# Altium PCB Amplification.PcbDoc
Units mm, origin at the board's own origin, x right, y up, seen from the top; angles counter-clockwise.
Board outline 40 x 40 mm, 2 copper layers (Top Layer, Bottom Layer), stack 1.534 mm thick; 12 components, 15 nets, 44 pads, 13 vias.
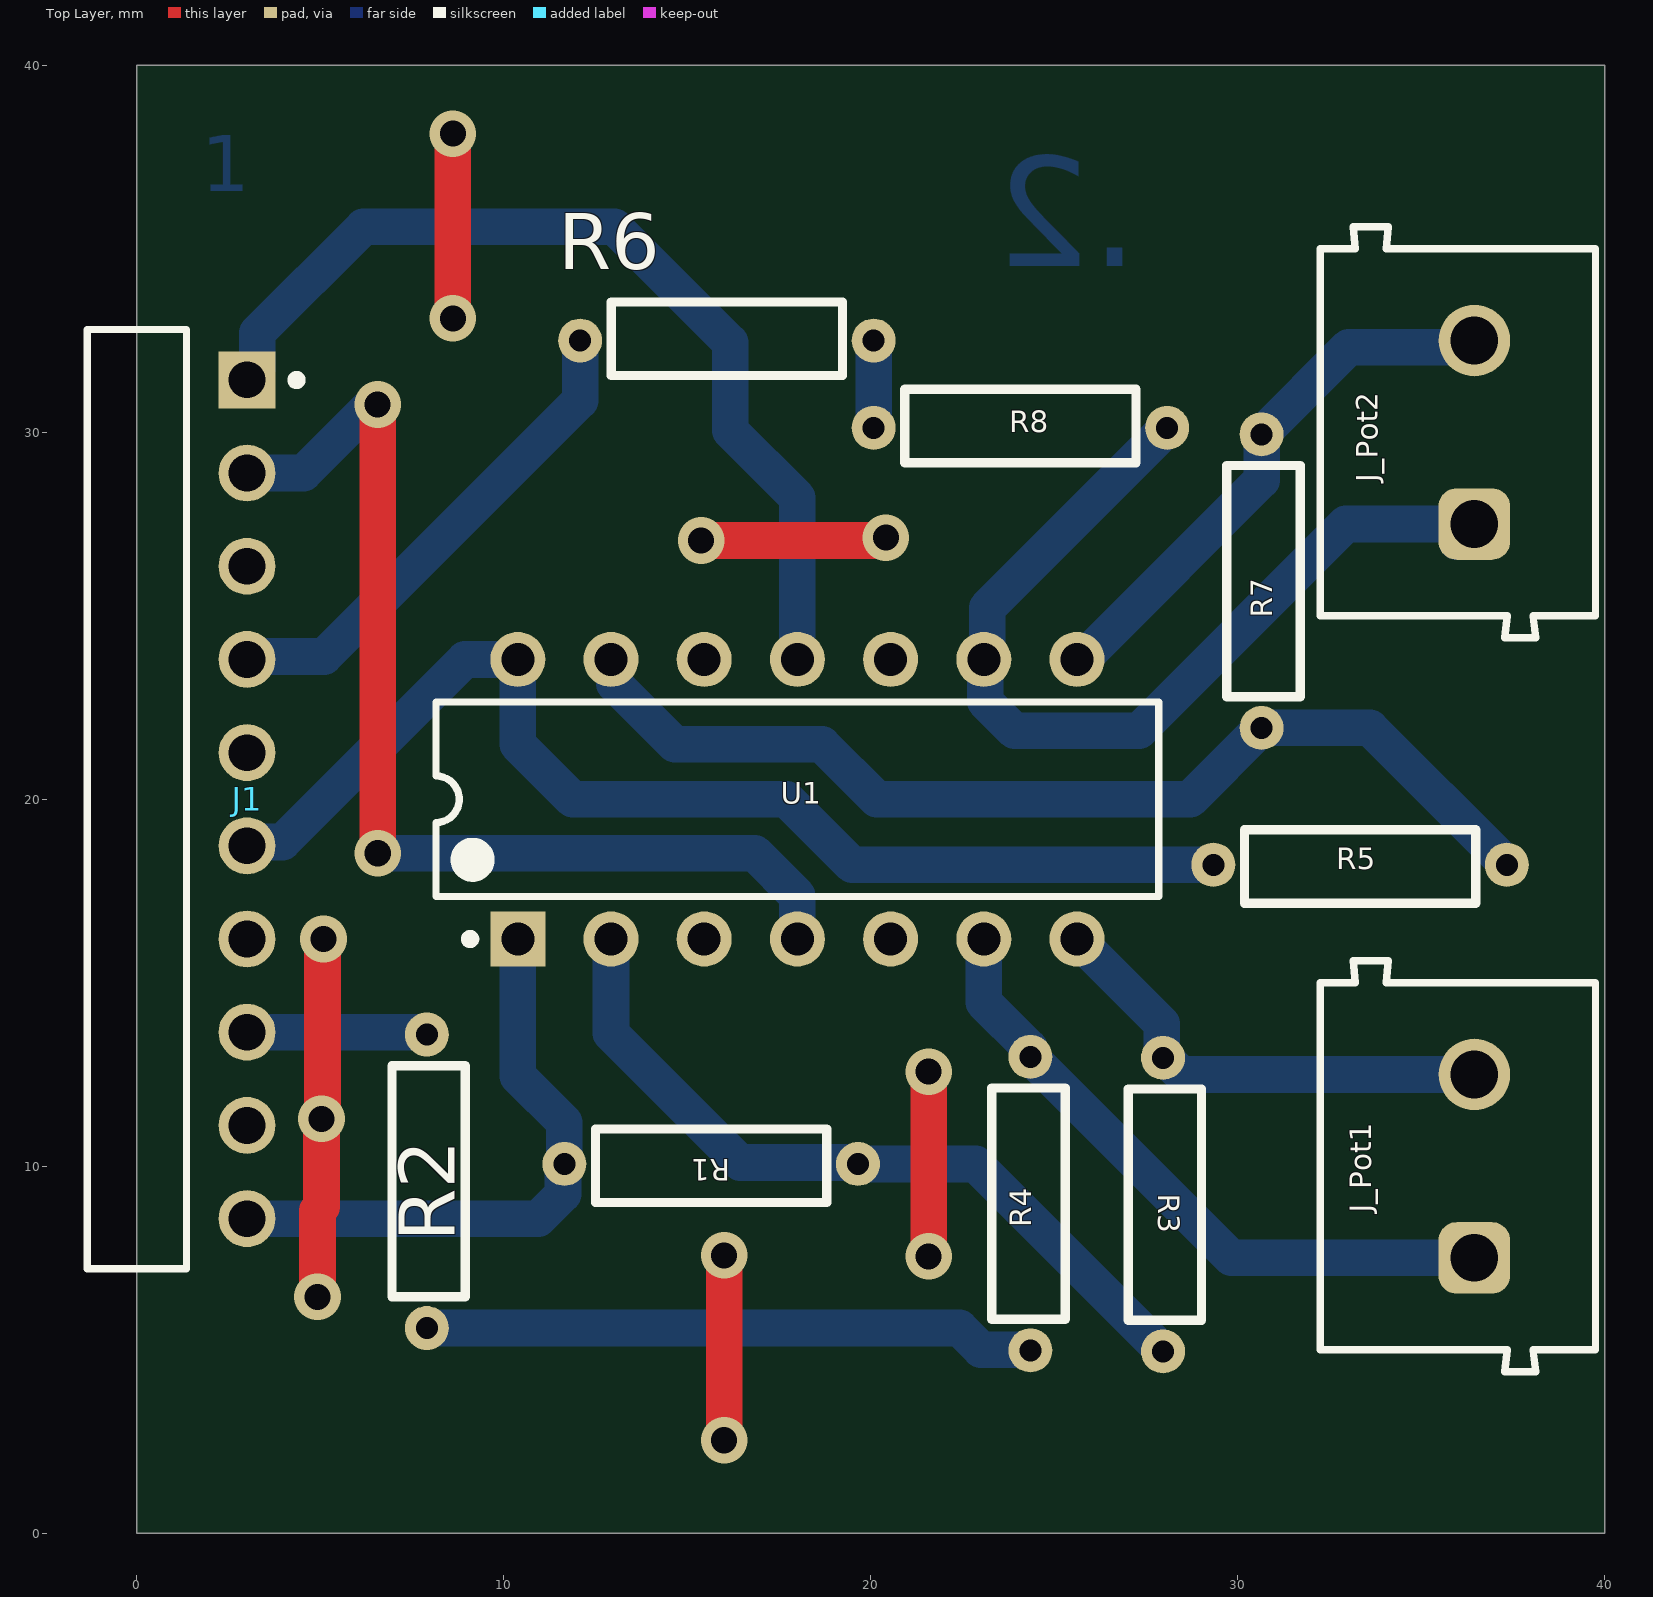
[diagram p0: Top Layer view]
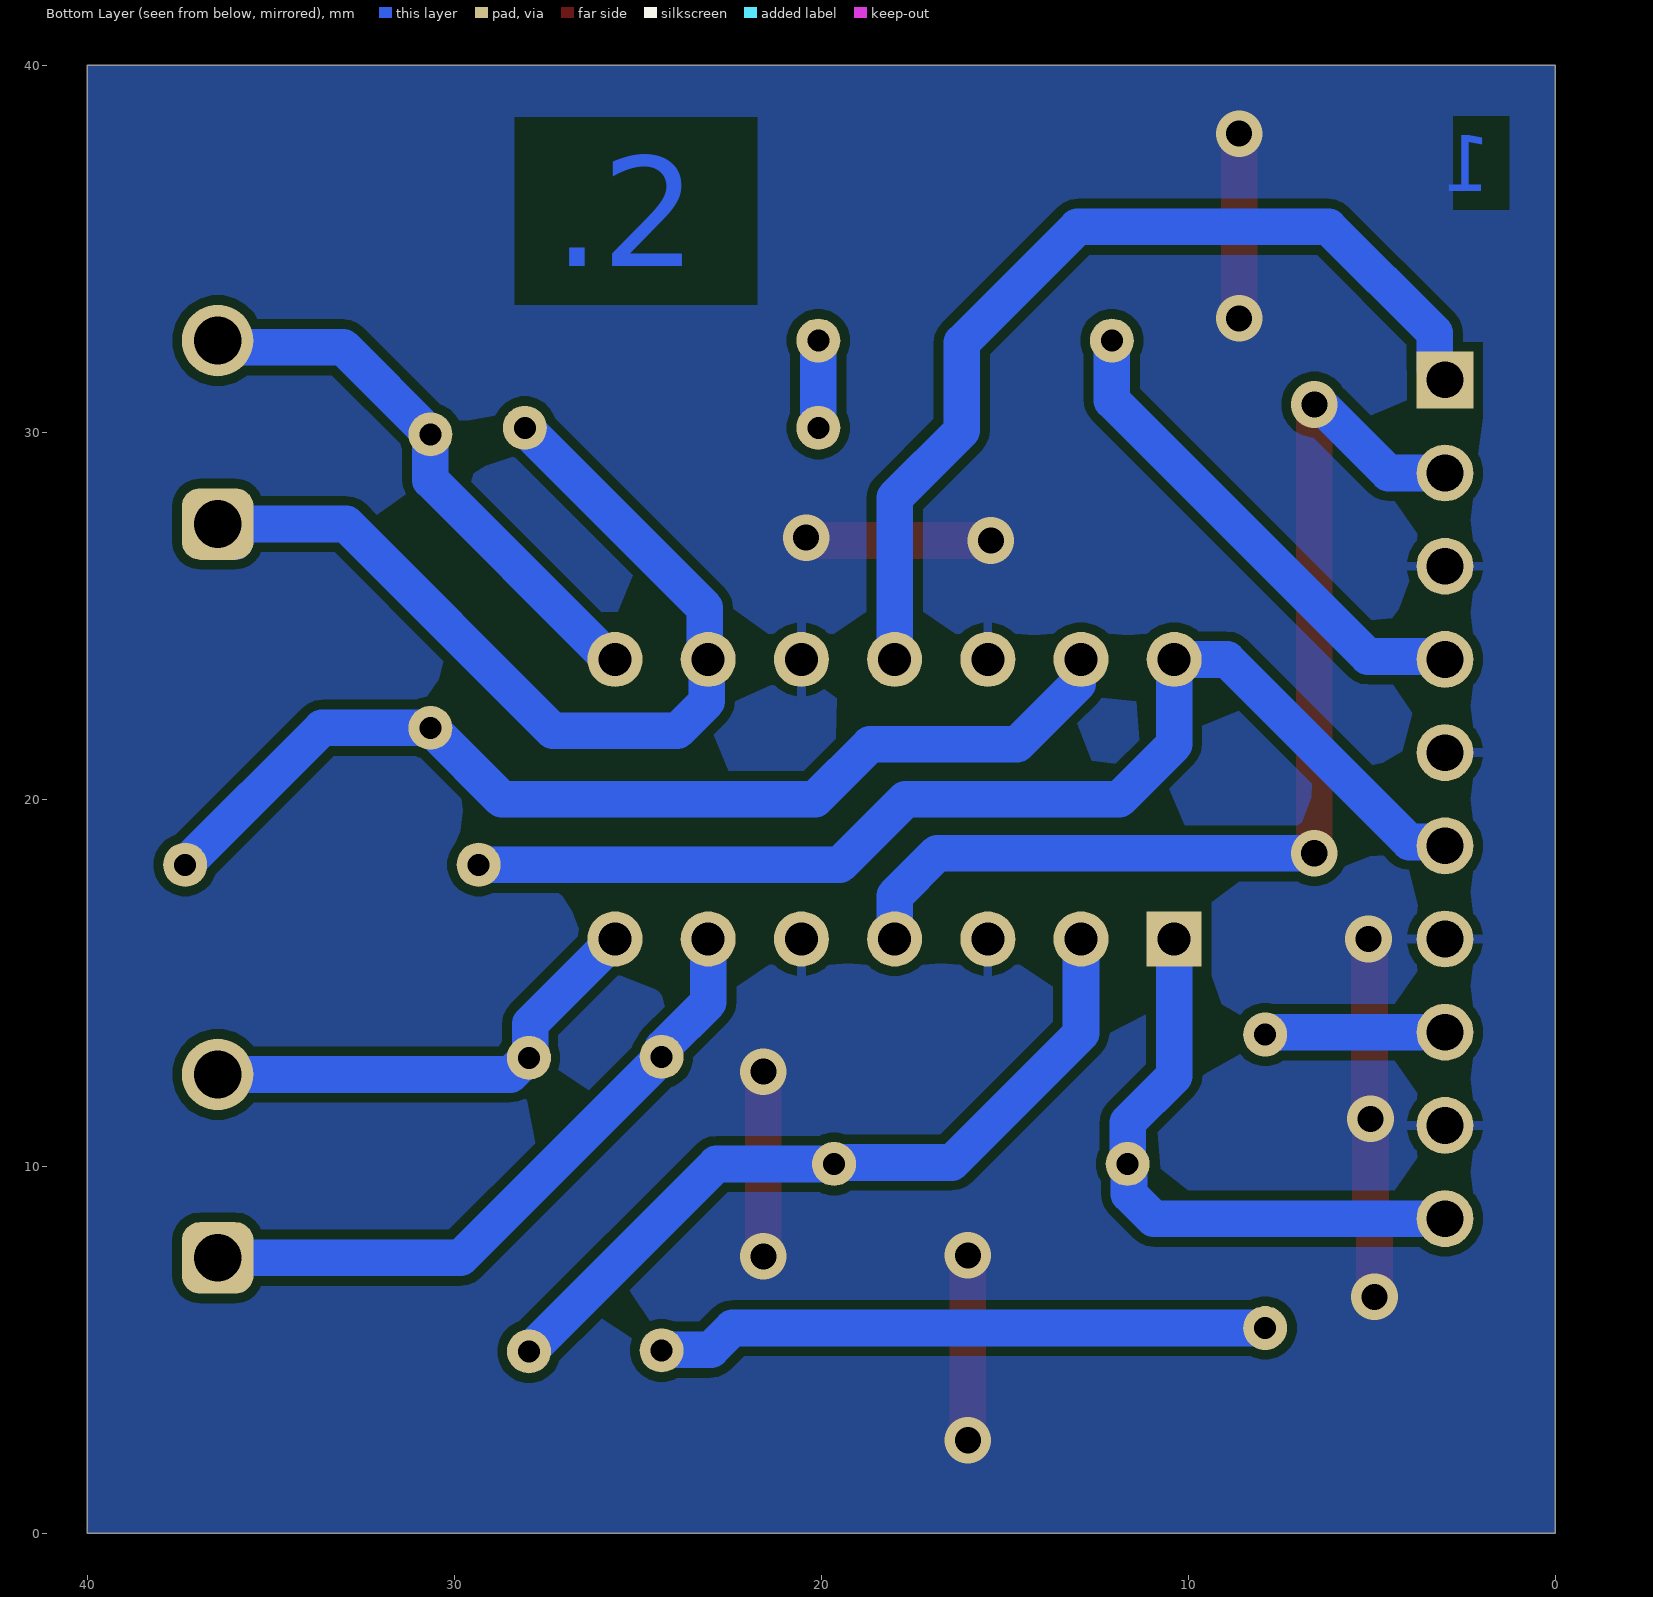
[diagram p1: Bottom Layer view, seen from below]

## Layer stack, top to bottom
Top Solder: solder mask 0.0127, Solder Resist, Dk 3.3
Top Layer: signal copper 0.0178
Dielectric1: core 1.4986, FR-4, Dk 4.3
Bottom Layer: signal copper 0.0178
Bottom Solder: solder mask 0.0127, Solder Resist, Dk 3.3

## Board outline
0,0 0,40 40,40 40,0

## Design rules (kind name [scope] priority, off if disabled: settings)
Clearance [All] p1: gap=0.254 ignorepadtopadclearanceinfootprint=FALSE except(0.2: Arc-THPad Track-THPad)
DiffPairsRouting [All] p1: maxlimit=0.254 minlimit=0.254 mostfreqgap=0.254 toplayer_minwidth=0.254 toplayer_maxwidth=0.254 toplayer_prefwidth=0.254 bottomlayer_minwidth=0.254 bottomlayer_maxwidth=0.254 bottomlayer_prefwidth=0.254 maxuncoupledlength=12.7
HoleSize [All] p1: absolutevalues=TRUE maxlimit=7.62 minlimit=0.254 maxpercent=80.000 minpercent=20.000
MinimumAnnularRing [All] p1: minimumring=0.254
PasteMaskExpansion [All] p1: expansion=0.254
PlaneClearance [All] p1: clearance=0.381
PlaneConnect [All] p1: pad.planeconnectstyle=Relief pad.reliefexpansion=0.508 pad.reliefentries=4 pad.reliefconductorwidth=0.254 pad.reliefairgap=0.254 via.planeconnectstyle=Direct via.reliefexpansion=0.508 via.reliefentries=4 via.reliefconductorwidth=0.254 via.reliefairgap=0.254
PolygonConnect [All] p1: thpad.connectstyle=Relief thpad.reliefconductorwidth=0.254 thpad.reliefentries=4 thpad.polygonreliefangle="90 Angle" thpad.airgapwidth=0.254 smdpad.connectstyle=Relief smdpad.reliefconductorwidth=0.254 smdpad.reliefentries=4 smdpad.polygonreliefangle="90 Angle" smdpad.airgapwidth=0.254 via.connectstyle=Direct via.reliefconductorwidth=0.254 via.reliefentries=4 via.polygonreliefangle="90 Angle" via.airgapwidth=0.254
RoutingVias [All] p1: holewidth=0.254 width=0.508 viastyle="Through Hole" minholewidth=0.254 minwidth=0.508 maxholewidth=0.254 maxwidth=0.508
SMDNeckDown [All] p1: percent=100.000
SilkToSolderMaskClearance SilkscreenOverComponentPads [IsPad] p1: minsilkscreentomaskgap=0.254 clearancetoexposedcopper=TRUE
SolderMaskExpansion [All] p1: expansion=0.254 istentingtop=FALSE
SupplyNets "Schematic Supply Nets" [InNet('GND')] p1: voltage=0.000
Width [All] p1: maxlimit=2 minlimit=1 preferedwidth=1 minimp=50.000000 maximp=50.000000 favimp=50.000000
24 further rules are at their usual default settings.

## Components (designator, comment, footprint, x,y, rotation, side; value= is the part's Value field where it differs from the comment)
J1 "90121-0770" FP-90121-0770-MFG 0,20 r270 top
J_Pot1 "691102710002" 691102710002 36,10 r90 top locked
J_Pot2 "691102710002" 691102710002 36,30 r90 top locked
R1 "Res_3.5x6.5mm_TH" Res_Axial_3.5x6.5mm_TH 19.65,10.061 r180 top value=10k
R2 "Res_3.5x6.5mm_TH" Res_Axial_3.5x6.5mm_TH 7.899,13.588 r270 top value=100
R3 "Res_3.5x6.5mm_TH" Res_Axial_3.5x6.5mm_TH 27.965,12.953 r270 top value=10k
R4 "Res_3.5x6.5mm_TH" Res_Axial_3.5x6.5mm_TH 24.35,4.98 r90 top value=220
R5 "Res_3.5x6.5mm_TH" Res_Axial_3.5x6.5mm_TH 37.335,18.214 r180 top value=10k
R6 "Res_3.5x6.5mm_TH" Res_Axial_3.5x6.5mm_TH 12.079,32.5 r0 top value=100
R7 "Res_3.5x6.5mm_TH" Res_Axial_3.5x6.5mm_TH 30.652,29.945 r270 top value=10k
R8 "Res_3.5x6.5mm_TH" Res_Axial_3.5x6.5mm_TH 20.079,30.124 r0 top value=220
U1 "TL084CN" N0014A 18,20 r90 top locked

## Footprints (in the part's own frame and the unit in brackets; to place one, negate y for a bottom-side part, rotate by r counter-clockwise, add the part's x,y. Pads: shape width x height; smd on the part's side, far side on the other; paste and mask are expansions set on the pad)
691102710002 [mm] "5,00mm - modular - blue - Horizontal entry with pressure clamp - 9,9 mm height - 02p"
  rrect50% 1.95x1.95 hole 1.3: 1(-2.5,-0.45)
  round 1.95 hole 1.3: 2(2.5,-0.45)
  silkscreen extent -5.6,-3.75 5.6,3.75, body extent -5.6,-3.75 5.6,3.75, height 9.96
FP-90121-0770-MFG [mm]
  rect 1.55x1.55 hole 1 paste-2539.97 mask+0: 1(-11.43,3)
  round 1.55 hole 1 paste-2539.97 mask+0: 2(-8.89,3) 3(-6.35,3) 4(-3.81,3) 5(-1.27,3) 6(1.27,3) 7(3.81,3) 8(6.35,3) 9(8.89,3) 10(11.43,3)
  silkscreen extent -12.8,-1.35 12.8,4.47, body extent -12.7,-8 12.7,3.32, height 3.6
N0014A [mm] "DIP, 14-Leads, Body 19.7x6.6mm, Pitch 2.54mm"
  rect 1.5x1.5 hole 0.9: 1(-3.81,7.62)
  round 1.5 hole 0.9: 2(-3.81,5.08) 3(-3.81,2.54) 4(-3.81,0) 5(-3.81,-2.54) 6(-3.81,-5.08) 7(-3.81,-7.62) 8(3.81,-7.62) 9(3.81,-5.08) 10(3.81,-2.54) 11(3.81,0) 12(3.81,2.54) 13(3.81,5.08) 14(3.81,7.62)
  silkscreen extent -3.93,-9.85 2.65,9.85, body extent -3.95,-9.85 3.95,9.85, height 5.08
Res_Axial_3.5x6.5mm_TH [mm]
  round 1.2 hole 0.6: 0(0,0) 1(8,0)
  silkscreen extent 0.85,-0.95 7.15,1.05, body extent 0.85,-1 7.15,1, height 2.1

## Part data
J1: library part CMP-04776-001047-1, "CONN HEADER R/A 10POS 2.54MM", Color=Black, Contact Resistance=20mR, Current Rating=3A, Insulation Resistance=5GR, Max Operating Temperature=125°C, Min Operating Temperature=-55°C, Package Quantity=1, Voltage Rating=350V, Connector Type="Male Pin", Contact Material=Brass, Contact Mating Length=0.266inch, Contact Plating=Gold, Contact Type="Male Pin", Gender=Male, Glow Wire Compliant=Non-compliant, Housing Color=Black, Housing Material=Polyester, Lead Free="Lead Free", Lead Pitch=2.54mm, Material=Glass, Mount="Through Hole", Number of Circuits=9, Number of Contacts=10, Number of Poles=10, Number of Positions=10, Number of Rows=1, Orientation="Right Angle", Packaging=Bulk, Pitch=2.54mm, Radiation Hardening=No, RoHS Compliant=Yes, Series="C-Grid III™ 90121", System=Connector, Termination=Solder, Voltage Rating (AC)=350V, Working Voltage=350V
J_Pot1 J_Pot2: library part CMP-1502-03258-2, Color=Blue, Current=15A, Max Operating Temperature=105°C, Min Operating Temperature=-40°C, Voltage=300V, Contact Material=Brass, Contact Plating=Tin, Current Rating=15A, Height=13.4mm, Housing Material=Nylon, Lead Pitch=5mm, Length=7.5mm, Mount="Through Hole", NexarPartId=8917706, Number of Contacts=2, Number of Levels=1, Number of Pins=2, Number of Positions Per Level=2, Packaging=Box, Pitch=5.0038mm, Plating=Steel, REACH SVHC=Unknown, RoHS=Compliant, Stripping Length=-6mm, Termination=Screw, Voltage Rating=300V, Width=11.2mm, Wire Gauge (Max)=22AWG, Wire Gauge (Min)=14AWG, Wire/Cable Gauge=22AWG
U1: library part CMP-0017-00818-2, "JFET-Input Operational Amplifier, 7 to 36 V, 0 to 70 degC, 14-pin DIP (N14), Pb-Free (RoHS)", Manufacturer="Texas Instruments", Rating=Catalog, Total Supply Voltage(Max)(+5V is 5, +/-5V is 10)=36, Total Supply Voltage(Min)(+5V is 5, +/-5V is 10)=7, CMRR(Min)(dB)=70, Code_JEDEC=MS-001, ComponentLink1Description="Manufacturer URL", ComponentLink1URL=http://www.ti.com/, ComponentLink2Description=Datasheet, ComponentLink2URL=http://www.ti.com/lit/ds/symlink/tl084.pdf, ComponentLink3Description="Package Specification", ComponentLink3URL=http://www.ti.com/lit/ml/mpdi002c/mpdi002c.pdf, DatasheetVersion=SLOS081G, Eco-Plan="Pb-Free (RoHS)", GBW(Typ)(MHz)=3, IIB(Max)(pA)=400, Iq per channel(Max)(mA)=2.8, Mounting Technology="Through Hole", Number of Channels=4, Offset Drift(Typ)(uV/C)=18, PackageDescription="14-Pin Plastic In-Line, Body 19.305 x 6.35 mm, Pitch 2.54 mm", PackageReference=N0014A, PackageVersion="4040049/E, 12/2002", PartNumber=TL084CN, Slew Rate(Typ)(V/us)=13, Sub Family="General Purpose Amplifier, High Supply Voltage Amplifier (>=30V)", Vio (25C)(Max)(mV)=15, Vn at 1kHz(Typ)(nV/rtHz)=18

## Via types
v1: diameter 1.27, hole 0.711, Top Layer to Bottom Layer, 13 vias

## Nets (pads, with @x,y where several pads share a name; then routed paths per layer and width w, separated by ;. In a path a pad name is that pad's centre, name@x,y a point inside that pad or via, vN(x,y) a via of type N, cw(c..) or ccw(c..) an arc to the next point about the centre after c; other vN are vias at no path point)
12V: J1.2 U1.4 | length 29.7
  Top Layer w1: v1(6.56,30.759) 6.562,30.757 6.562,18.531 v1(6.564,18.529)
  Bottom Layer w1: J1.2 4.54,28.89 6.274,30.624 6.352,30.624 6.487,30.759 v1(6.56,30.759) ; v1(6.564,18.529) 16.838,18.529 17.997,17.369 17.997,16.193 U1.4
-12V: J1.1 U1.11 | length 26.2
  Bottom Layer w1: J1.1 3.275,31.705 3.275,32.705 6.17,35.6 13.015,35.6 16.168,32.448 16.168,30.049 18,28.217 U1.11
GND: J1.3 J1.5 J1.7 J1.9 U1.3 U1.5 U1.10 U1.12 | length 30
  Top Layer w1: v1(4.92,6.438) 4.92,8.782 5.029,8.891 v1(5.029,11.287) 5.057,11.315 5.057,16.162 v1(5.085,16.19) ; v1(8.609,33.105) v1(8.609,38.142) ; v1(15.375,27.05) 20.413,27.05 v1(20.413,27.128) ; v1(16.003,2.53) v1(16.003,7.567) ; v1(21.577,7.54) v1(21.577,12.578)
NetJ_Pot1_1: J_Pot1.1 R4.1 U1.6 | length 18.1
  Bottom Layer w1: U1.6 23.08,14.465 24.312,13.233 24.312,13.018 29.83,7.5 J_Pot1.1
NetJ_Pot1_2: J_Pot1.2 R3.0 U1.7 | length 12.9
  Bottom Layer w1: U1.7@25.644,16.166 U1.7 27.927,13.883 27.927,12.991 R3.0 28.02,12.953 28.473,12.5 J_Pot1.2
NetJ_Pot2_1: J_Pot2.1 R8.1 U1.9 | length 25.7
  Bottom Layer w1: U1.9 23.176,23.906 23.176,25.22 R8.1 ; U1.9@23.118,23.81 23.118,22.666 23.92,21.864 27.308,21.864 32.944,27.5 J_Pot2.1@35.975,27.5 ; J_Pot2.1@35.975,27.025 J_Pot2.1
NetJ_Pot2_2: J_Pot2.2 R7.0 U1.8 | length 15.2
  Bottom Layer w1: U1.8 25.755,23.81 26.005,24.06 26.015,24.06 30.652,28.697 R7.0 33.025,32.318 36.268,32.318 J_Pot2.2
NetR1_0: R1.0 R3.1 U1.2 | length 21.2
  Bottom Layer w1: U1.2 12.92,13.619 16.44,10.099 19.612,10.099 R1.0@19.666,10.045 ; R1.0 22.858,10.061 R3.1
NetR2_1: R2.1 R4.0 | length 16.7
  Bottom Layer w1: R2.1 22.418,5.588 23.006,5 R4.0@24.368,5
NetR5_0: R5.0 R7.1 U1.13 | length 28.6
  Bottom Layer w1: U1.13 13.016,23.714 13.016,23.144 14.664,21.495 18.67,21.495 20.165,20 28.707,20 R7.1@30.613,21.907 ; R7.1 33.604,21.945 R5.0
NetR6_1: R6.1 R8.0 | length 2.4
  Bottom Layer w1: R8.0 R6.1
V_IN_Ampli_1: J1.8 R2.0 | length 4.9
  Bottom Layer w1: J1.8 7.783,13.65 7.807,13.626 7.814,13.626 R2.0@7.837,13.65
V_IN_Ampli_2: J1.4 R6.0 | length 13.3
  Bottom Layer w1: J1.4@3.254,23.888 5.098,23.888 12.079,30.87 R6.0
V_OUT_Ampli_1: J1.10 R1.1 U1.1 | length 16.4
  Bottom Layer w1: J1.10 10.94,8.57 11.612,9.241 11.612,10.023 R1.1 11.65,11.188 10.38,12.458 U1.1
V_OUT_Ampli_2: J1.6 R5.1 U1.14 | length 32.1
  Bottom Layer w1: J1.6 3.105,18.835 3.968,18.835 8.942,23.81 U1.14 10.38,21.495 11.875,20 17.708,20 19.494,18.214 R5.1

## Polygon pours and split planes (outlines as drawn)
GND on Bottom Layer "GND_L02_P000" (solid, pour order 0): 0,0 0,40 40,40 40,0

## Other copper
Bottom Layer:
  text "1" at 1.753,36.576 h1.52
  text ".2" at 27.3,34.529 h3

## Silkscreen, mask and mechanical layers (free items; w line width, h text height)
Board:
  the board outline again, w0.254